# EAGLE board 555_timer (EAGLE 5.07)
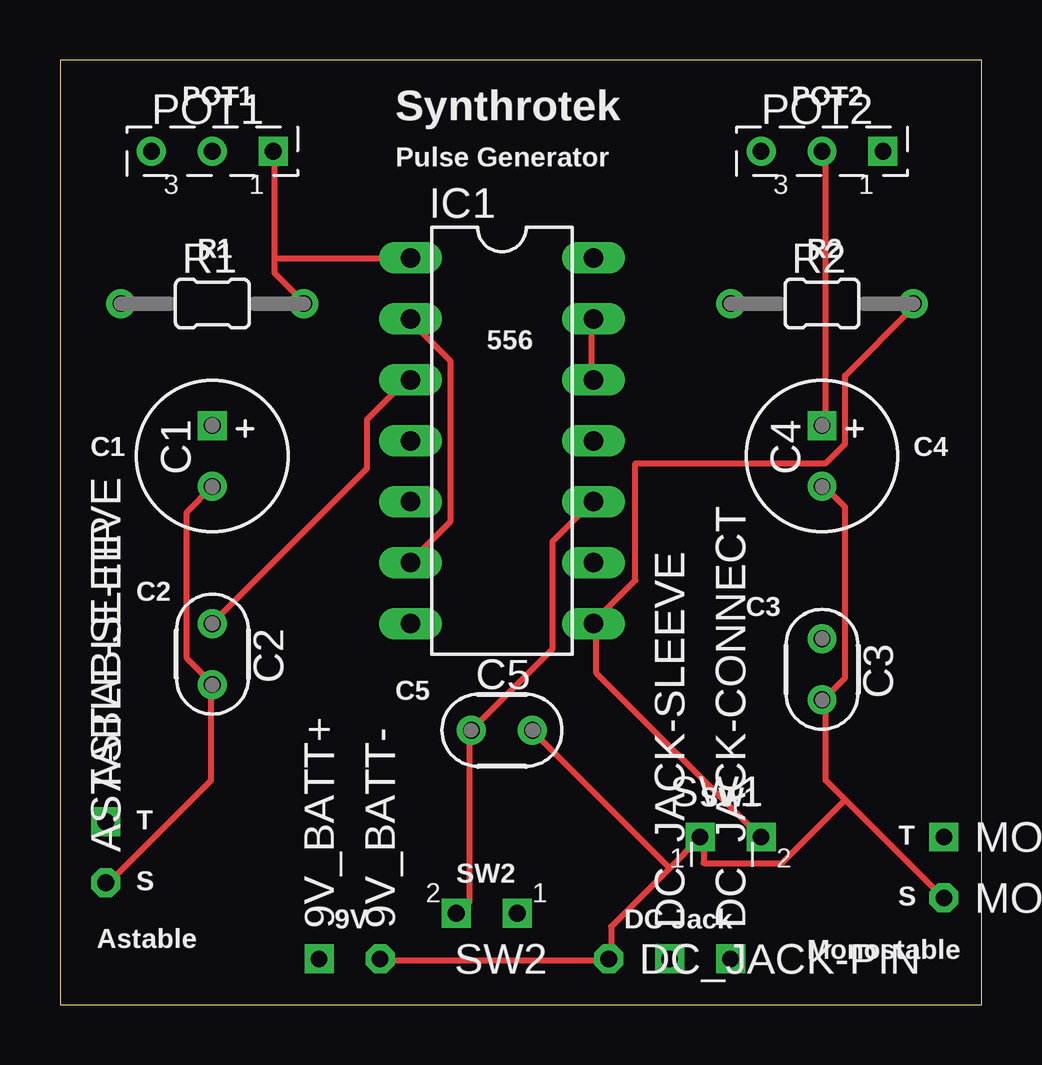
[diagram p0: board, top side]
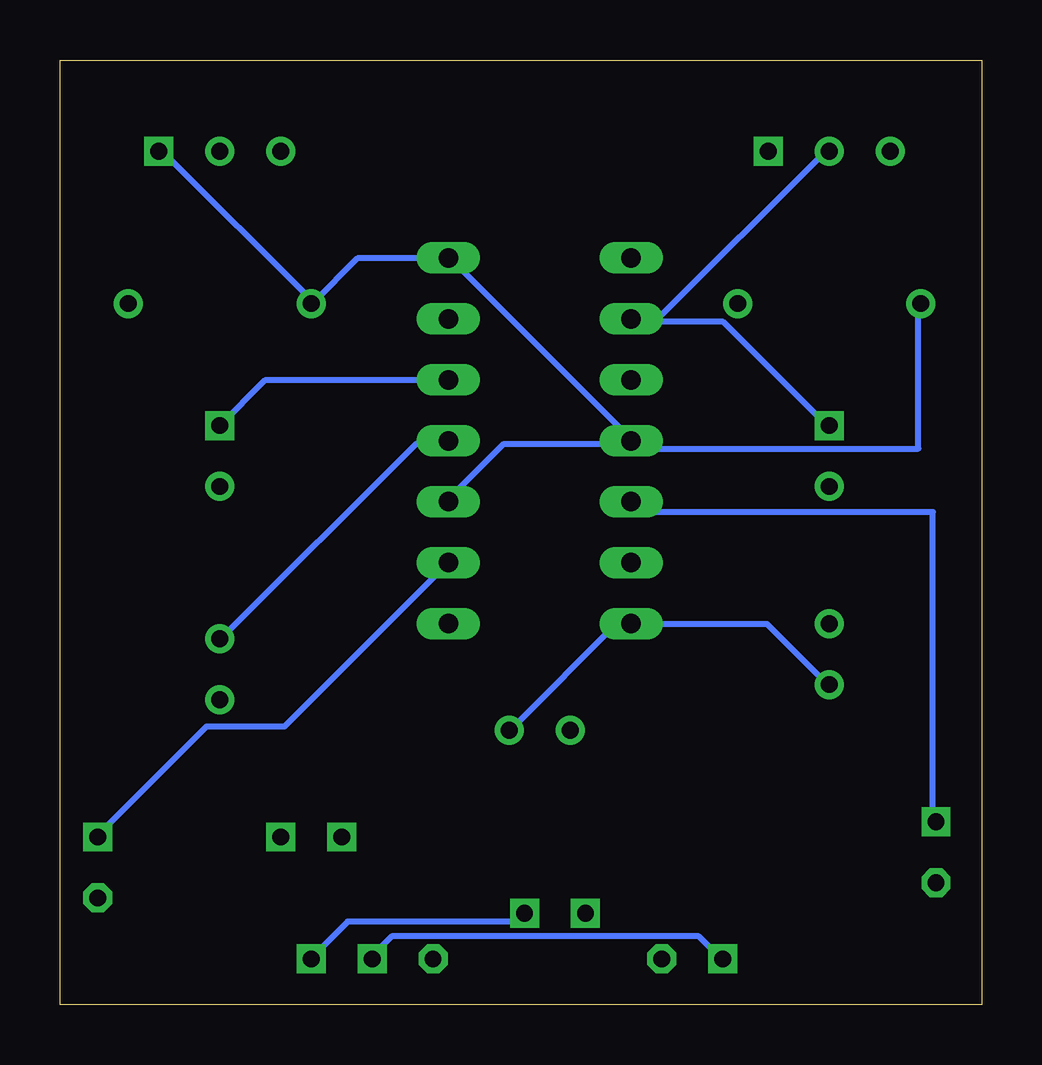
[diagram p1: board, bottom side, seen from below]

Size 38.41 x 39.36 mm. Coordinates in mm from the lower left corner, seen from the top.
Outline: 0,0 38.41,0 38.41,39.36 0,39.36 0,0
Copper layers (1*16): Top 0.035mm / dielectric 1.5mm / Bottom 0.035mm
Design rules "default": minimum track width 10mil, minimum drill 24mil, track to track 8mil, track to pad 8mil, pad to pad 8mil, via to via 8mil, smd to smd 8mil, copper to edge 40mil, drill to drill 8mil, minimum pad ring 10mil, minimum via ring 8mil, stop-mask expansion 4mil, vias tented up to drill 0mil, thermal gap 10mil

## Footprints (pad centres in the part's own frame; a part is rotated, then mirrored left to right if it is on the bottom)
SQUARE = drill 0.7 square: 1 0,0
OCTOGON = drill 0.7 octagon: 1 0,0
063_025 = drill 0.7 square: + -1.27,0 | drill 0.7 round: - 1.27,0
050X030_025 = drill 0.7 round: 1 -1.27,0; 2 1.27,0
DIL14 = drill 0.813 long: 1 -7.62,-3.81; 2 -5.08,-3.81; 3 -2.54,-3.81; 4 0,-3.81; 5 2.54,-3.81; 6 5.08,-3.81; 7 7.62,-3.81; 8 7.62,3.81; 9 5.08,3.81; 10 2.54,3.81; 11 0,3.81; 12 -2.54,3.81; 13 -5.08,3.81; 14 -7.62,3.81
POT = drill 0.7 square: 1 2.54,0 | drill 0.7 round: 2 0,0; 3 -2.54,0
R0204/3 = drill 0.7 round: 1 -3.81,0; 2 3.81,0
SPST = drill 0.7 square: 1 -1.27,0; 2 1.27,0

## Placement (x,y rotation side)
9V_BATT+  [SQUARE]  10.79,1.91 90 top
9V_BATT-  [OCTOGON]  13.34,1.91 90 top
ASTABLE-SLEEVE  [OCTOGON]  1.91,5.08 90 top
ASTABLE-TIP  [SQUARE]  1.91,7.62 90 top
C1  22uF  [063_025]  6.35,22.86 270 top
C2  0.01uF  [050X030_025]  6.35,14.61 270 top
C3  0.01uF  [050X030_025]  31.75,13.97 270 top
C4  47uF  [063_025]  31.75,22.86 270 top
C5  0.1uF  [050X030_025]  18.41,11.43 0 top
DC_JACK-CONNECT  [SQUARE]  27.94,1.91 90 top
DC_JACK-PIN  [OCTOGON]  22.86,1.91 0 top
DC_JACK-SLEEVE  [SQUARE]  25.4,1.91 90 top
IC1  NE556N  [DIL14]  18.41,23.5 270 top
MONOSTABLE-SLEEVE  [OCTOGON]  36.83,4.45 0 top
MONOSTABLE-TIP  [SQUARE]  36.83,6.99 0 top
POT1  100kB  [POT]  6.35,35.56 0 top
POT2  10kB  [POT]  31.75,35.56 0 top
R1  1k  [R0204/3]  6.35,29.21 0 top
R2  100K  [R0204/3]  31.75,29.21 0 top
SW1  SPST  [SPST]  27.94,6.99 0 top
SW2  SPST  [SPST]  17.78,3.81 180 top

## Library data of the parts
9V_BATT+ 9V_BATT- ASTABLE-SLEEVE ASTABLE-TIP DC_JACK-CONNECT DC_JACK-PIN DC_JACK-SLEEVE MONOSTABLE-SLEEVE MONOSTABLE-TIP = gm-supply
C1 C4 = gm-caps-electro-pol
C2 C3 C5 = gm-caps-ceramic
IC1 = linear
POT1 POT2 = gm-pots
R1 R2 = gm-resistors
SW1 SW2 = gm-switches

## Nets
+9V: C5.1 IC1.4 IC1.10 IC1.14 POT2.1 R1.1 R2.1 SW2.2
C1: C1.+ IC1.2 IC1.6 POT1.2
GND: 9V_BATT-.1 ASTABLE-SLEEVE.1 C1.- C2.2 C3.2 C4.- C5.2 DC_JACK-PIN.1 IC1.7 MONOSTABLE-SLEEVE.1 SW1.1
N$1: 9V_BATT+.1 DC_JACK-SLEEVE.1
N$2: IC1.1 POT1.1 R1.2
N$3: DC_JACK-CONNECT.1 SW2.1
N$5: C4.+ IC1.12 IC1.13 POT2.2
N$6: C2.1 IC1.3
N$8: ASTABLE-TIP.1 IC1.5
N$9: IC1.9 MONOSTABLE-TIP.1
N$12: C3.1 IC1.11
N$16: IC1.8 R2.2 SW1.2

## Tracks (layer width: path | path; a pad name or v marks a point on that pad's centre or on a via)
+9V
  Top 0.254: SW2.2 16.66,3.86 17.07,4.27 17.07,11.38 C5.1 17.27,11.58 20.52,14.83 20.52,19.3 22.15,20.93 IC1.10
  Bottom 0.254: 27.84,29.26 26.01,31.09 22.35,31.09 IC1.14 22.15,31.09 14.63,23.57 IC1.4 | 27.84,29.26 34.14,35.56 POT2.1 | 27.84,29.26 R2.1 | R1.1 2.64,29.06 2.64,23.16 14.22,23.16 14.43,23.37 IC1.4 | IC1.10 22.15,21.13 19.91,23.37 14.63,23.37 IC1.4
C1
  Top 0.254: IC1.6 14.63,18.49 16.26,20.12 16.26,26.82 14.63,28.45 IC1.2
  Bottom 0.254: 13.61,28.45 14.43,28.45 IC1.2 13.61,28.45 | 13.61,28.45 10.77,28.45 6.5,24.18 C1.+ | 13.61,28.45 6.5,35.56 POT1.2
GND
  Top 0.254: C4.- 31.9,21.54 32.72,20.73 32.72,13.61 31.9,12.8 C3.2 31.9,12.6 31.9,9.35 32.72,8.53 | 32.72,8.53 36.78,4.47 MONOSTABLE-SLEEVE.1 | ASTABLE-SLEEVE.1 2.03,5.08 6.3,9.35 6.3,13.21 C2.2 6.3,13.41 5.28,14.43 5.28,20.52 C1.- | 9V_BATT-.1 13.41,1.83 22.76,1.83 DC_JACK-PIN.1 22.96,2.03 22.96,3.25 25.4,5.69 | 25.4,5.69 26.62,6.91 SW1.1 26.82,6.91 26.82,5.89 30.07,5.89 32.72,8.53 | 25.4,5.69 19.71,11.38 C5.2
  Bottom 0.254: C5.2 19.51,11.58 15.24,15.85 14.63,15.85 IC1.7 14.43,15.85 8.94,15.85 6.5,13.41 C2.2
N$1
  Bottom 0.254: 9V_BATT+.1 10.97,2.03 11.79,2.85 24.59,2.85 25.4,2.03 DC_JACK-SLEEVE.1
N$2
  Top 0.254: 8.94,31.09 8.94,35.56 POT1.1 | 8.94,31.09 8.94,30.48 10.16,29.26 R1.2 | 8.94,31.09 14.43,31.09 IC1.1
N$3
  Bottom 0.254: SW2.1 19.1,3.66 19.3,3.45 26.42,3.45 27.84,2.03 DC_JACK-CONNECT.1
N$5
  Top 0.254: POT2.2 31.9,35.56 31.9,24.18 C4.+ | IC1.13 22.15,28.45 22.15,26.21 IC1.12
  Bottom 0.254: C4.+ 29.87,26.01 22.35,26.01 IC1.12
N$6
  Top 0.254: C2.1 6.5,16.05 12.8,22.35 12.8,24.38 14.43,26.01 IC1.3
N$8
  Bottom 0.254: ASTABLE-TIP.1 2.03,7.72 2.03,20.52 14.02,20.52 14.43,20.93 IC1.5
N$9
  Bottom 0.254: MONOSTABLE-TIP.1 36.78,7.11 32.31,11.58 29.06,11.58 IC1.9
N$12
  Bottom 0.254: C3.1 31.7,15.24 23.57,23.37 22.35,23.37 IC1.11
N$16
  Top 0.254: SW1.2 29.06,7.11 22.35,13.82 22.35,15.85 IC1.8 22.35,16.05 23.98,17.68 23.98,22.55 31.9,22.55 32.72,23.37 32.72,26.21 35.56,29.06 R2.2

## Text on the board
tPlace: POT1 | Synthrotek | POT2 | Pulse Generator | R1 | R2 | 556 | C1 | C4 | C2 | C3 | C5 | SW1 | T | T | S | SW2 | S | Astable | 9V | DC Jack | Monostable